# EAGLE board CT_schematic (EAGLE 7.6.0)

Size 100 x 80 mm. Coordinates in mm from the lower left corner, seen from the top.
Outline: 0,0 100,0 100,80 0,80 0,0
Copper layers (1*16): Top 0.035mm / dielectric 1.5mm / Bottom 0.035mm
Design rules "default": minimum track width 10mil, minimum drill 24mil, track to track 8mil, track to pad 8mil, pad to pad 8mil, via to via 8mil, smd to smd 8mil, copper to edge 40mil, drill to drill 8mil, minimum pad ring 10mil, minimum via ring 8mil, stop-mask expansion 4mil, vias tented up to drill 0mil, thermal gap 10mil

## Footprints (pad centres in the part's own frame; a part is rotated, then mirrored left to right if it is on the bottom)
C0603 = smd 0.8 x 0.8: 1 -0.762,0; 2 0.762,0
C0402 = smd 0.5 x 0.5: 1 -0.508,0; 2 0.508,0
C0805 = smd 1.2 x 1.3: 1 -1.016,0; 2 1.016,0
C1206 = smd 1.3 x 1.6: 1 -1.524,0; 2 1.524,0
L0603 = smd 0.8 x 0.8: 1 -0.762,0; 2 0.762,0
R0603 = smd 0.8 x 0.8: 1 -0.762,0; 2 0.762,0
UFQFPN32 = smd 0.6 x 0.3: 1 -2.35,1.75; 2 -2.35,1.25; 3 -2.35,0.75; 4 -2.35,0.25; 5 -2.35,-0.25; 6 -2.35,-0.75; 7 -2.35,-1.25; 8 -2.35,-1.75; 17 2.35,-1.75; 18 2.35,-1.25; 19 2.35,-0.75; 20 2.35,-0.25; 21 2.35,0.25; 22 2.35,0.75; 23 2.35,1.25; 24 2.35,1.75 | smd 0.3 x 0.6: 9 -1.75,-2.35; 10 -1.25,-2.35; 11 -0.75,-2.35; 12 -0.25,-2.35; 13 0.25,-2.35; 14 0.75,-2.35; 15 1.25,-2.35; 16 1.75,-2.35; 25 1.75,2.35; 26 1.25,2.35; 27 0.75,2.35; 28 0.25,2.35; 29 -0.25,2.35; 30 -0.75,2.35; 31 -1.25,2.35; 32 -1.75,2.35 | smd 3.45 x 3.45: EPAD 0,0
TST-110-05-T-D-RA = drill 1 pad 1.7 square: 1 0,0 | drill 1 pad 1.7: 2 0,2.54; 3 2.54,0; 4 2.54,2.54; 5 5.08,0; 6 5.08,2.54; 7 7.62,0; 8 7.62,2.54; 9 10.16,0; 10 10.16,2.54; 11 12.7,0; 12 12.7,2.54; 13 15.24,0; 14 15.24,2.54; 15 17.78,0; 16 17.78,2.54; 17 20.32,0; 18 20.32,2.54; 19 22.86,0; 20 22.86,2.54
FCI_10118193-0001LF = smd 0.4 x 1.35: 1 -1.3,2.675; 2 -0.65,2.675; 3 0,2.675; 4 0.65,2.675; 5 1.3,2.675 | smd 1.6 x 1.4: 6 -3.2,2.45; 7 3.2,2.45 | smd 1.9 x 1.9: 8 -1.2,0; 9 1.2,0 | hole 0.5: -3.3,0; 3.3,0
SOT143B = smd 1 x 0.7: 1 -0.75,-1 | smd 0.6 x 0.7: 2 0.95,-1; 3 0.95,1; 4 -0.95,1
ABS07-32.768KHZ-7-T = smd 1.1 x 2.4: 1 -2.5,0; 2 0,0
WSON-8 = smd 0.3 x 0.6: 1 -0.75,0; 2 0.05,0; 3 0.85,0; 4 1.65,0; 5 1.65,3.8; 6 0.85,3.8; 7 0.05,3.8; 8 -0.75,3.8 | smd 3 x 2.6: PAD 0.45,1.9
DFN8_2X3MC = smd 0.813 x 0.305: 1 -1.398,0.75; 2 -1.398,0.25; 3 -1.398,-0.25; 4 -1.398,-0.75; 5 1.398,-0.75; 6 1.398,-0.25; 7 1.398,0.25; 8 1.398,0.75 | smd 1.753 x 1.549: 9 0,0
JST-2-SMD = smd 1 x 4.6: 1 -1,-3.7; 2 1,-3.7 | smd 1.6 x 3.4: NC1 -3.4,1.5; NC2 3.4,1.5
SON-6 = smd 0.55 x 0.3: 1 -0.355,0.5 | smd 0.52 x 0.3: 2 -0.37,0; 3 -0.37,-0.5; 4 0.37,-0.5; 5 0.37,0; 6 0.37,0.5
SW_4-1437565-2 = smd 1.4 x 2.1: 1 -2.23,4.55; 2 -2.23,-4.55; 3 2.23,4.55; 4 2.23,-4.55
LGM67K-G1J2-24-Z = smd 0.8 x 1.4: A -2,0; C 0,0
NC7SZ125M5X = smd 1.3 x 0.7: 1 -1.3,0.95; 2 -1.3,0; 3 -1.3,-0.95; 4 1.3,-0.95; 5 1.3,0.95

## Placement (x,y rotation side)
C1  1e-07  [C0603]  -53.34,46.99 0 top  (outside the outline)
C2  1e-07  [C0603]  -57.15,46.99 0 top  (outside the outline)
C3  1e-07  [C0603]  -15.24,52.07 0 top  (outside the outline)
C4  1e-07  [C0603]  -19.05,52.07 0 top  (outside the outline)
C5  4.7e-06  [C0603]  -49.53,46.99 0 top  (outside the outline)
C6  1e-08  [C0603]  -22.86,52.07 0 top  (outside the outline)
C7  1e-06  [C0603]  -26.67,52.07 0 top  (outside the outline)
C8  1e-11  [C0402]  -53.34,52.07 0 top  (outside the outline)
C9  1e-11  [C0402]  -57.15,52.07 0 top  (outside the outline)
C10  1e-07  [C0402]  -15.24,57.15 0 top  (outside the outline)
C11  1e-06  [C0603]  -30.48,52.07 0 top  (outside the outline)
C12  1e-05  [C0805]  -27.94,40.64 0 top  (outside the outline)
C13  1e-07  [C0402]  -19.05,57.15 0 top  (outside the outline)
C14  1e-05  [C1206]  -48.26,33.02 0 top  (outside the outline)
C15  1e-05  [C1206]  -54.61,33.02 0 top  (outside the outline)
C16  1e-08  [C0402]  -22.86,57.15 0 top  (outside the outline)
C17  1e-08  [C0402]  -26.67,57.15 0 top  (outside the outline)
F1  240.0  [L0603]  -34.29,52.07 0 top  (outside the outline)
R1  10000.0  [R0603]  -53.34,40.64 0 top  (outside the outline)
R2  1000.0  [R0603]  -38.1,52.07 0 top  (outside the outline)
R3  910.0  [R0603]  -41.91,52.07 0 top  (outside the outline)
R4  4700.0  [R0603]  -45.72,52.07 0 top  (outside the outline)
R5  10000.0  [R0603]  -15.24,46.99 0 top  (outside the outline)
R6  10000.0  [R0603]  -20.32,46.99 0 top  (outside the outline)
R7  100000.0  [R0603]  -33.02,40.64 0 top  (outside the outline)
R8  36000.0  [R0603]  -25.4,46.99 0 top  (outside the outline)
R9  100000.0  [R0603]  -38.1,40.64 0 top  (outside the outline)
R10  10000.0  [R0603]  -30.48,46.99 0 top  (outside the outline)
R11  10000.0  [R0603]  -35.56,46.99 0 top  (outside the outline)
R12  82000.0  [R0603]  -40.64,46.99 0 top  (outside the outline)
R13  300000.0  [R0603]  -43.18,40.64 0 top  (outside the outline)
R14  120000.0  [R0603]  -48.26,40.64 0 top  (outside the outline)
R15  2000.0  [R0603]  -49.53,52.07 0 top  (outside the outline)
R16  10000.0  [R0603]  -45.72,46.99 0 top  (outside the outline)
U1  STM32L062K8U6  [UFQFPN32]  -24.13,17.78 0 top  (outside the outline)
U2  TST-110-05-T-D-RA  [TST-110-05-T-D-RA]  -46.99,24.13 0 top  (outside the outline)
U3  10118193-0001LF  [FCI_10118193-0001LF]  -50.8,16.51 0 top  (outside the outline)
U4  prtr5v0u2ax  [SOT143B]  -39.37,57.15 0 top  (outside the outline)
U5  ABS07-32.768KHZ-7-T  [ABS07-32.768KHZ-7-T]  -27.94,34.29 0 top  (outside the outline)
U6  LP2951ACSDX/NOPB  [WSON-8]  -43.18,15.24 0 top  (outside the outline)
U7  MCP73831T-2ACI/MC  [DFN8_2X3MC]  -49.53,55.88 0 top  (outside the outline)
U8  S2B-PH-SM4-TB(LF)(SN)  [JST-2-SMD]  -41.91,6.35 0 top  (outside the outline)
U9  TPS3895ADRYR  [SON-6]  -43.18,55.88 0 top  (outside the outline)
U10  4-1437565-2  [SW_4-1437565-2]  -27.94,6.35 0 top  (outside the outline)
U11  Q65110A2395  [LGM67K-G1J2-24-Z]  -36.83,34.29 0 top  (outside the outline)
U12  nc7sz125m5x  [NC7SZ125M5X]  -15.24,40.64 0 top  (outside the outline)
U13  nc7sz125m5x  [NC7SZ125M5X]  -21.59,40.64 0 top  (outside the outline)

## Library data of the parts
C1-C17 F1 R1-R16 U1-U13 = circuit_tree

## Nets
CLK_CRYSTAL_U1_2: C8.1 U1.2 U5.1
CLK_CRYSTAL_U1_3: C9.1 U1.3 U5.2
GND: C1.2 C2.2 C3.2 C4.2 C5.2 C6.2 C7.2 C8.2 C9.2 C10.2 C11.2 C12.2 C13.2 C14.2 C15.2 C16.2 C17.2 R2.2 R5.2 R9.2 R12.2 R14.2 R15.2 U1.EPAD U2.4 U2.6 U2.8 U2.10 U2.12 U2.14 U2.16 U2.18 U2.20 U3.5 U3.6 U3.7 U3.8 U3.9 U4.1 U6.3 U6.4 U6.PAD U7.6 U7.9 U8.2 U9.2 U11.C U12.2 U12.3 U13.1 U13.3
INPUT_USBPOWER_5V: C14.1 R16.2 U3.1 U4.4 U7.1 U7.2
NET_U1_4: R4.1 U1.4 U13.4
NET_U1_5: C6.1 C7.1 F1.1 U1.5
NET_U1_30: R3.1 U1.30 U11.A
NET_U1_31: R5.1 U1.31
NET_U1_32: R1.1 U1.32 U10.3 U10.4
NET_U6_5: R7.1 U6.5
NET_U6_7: R8.2 R9.1 U6.7
NET_U7_5: R16.1 U7.5
NET_U7_8: R15.1 U7.8
NET_U9_1: R11.1 R12.1 U9.1
NET_U9_3: R13.2 R14.1 U9.3
NET_U9_4: R10.1 U9.4 U12.4 U13.2
NET_U10_1: R2.1 U10.1 U10.2
PROC_SYS_SWCLK: U1.24 U2.9
PROC_SYS_SWDIO: U1.23 U2.7
PROC_USB_DM: U1.21 U3.2 U4.3
PROC_USB_DP: U1.22 U3.3 U4.2
RST_OUT_U2_SRESET_B: R6.1 U2.15 U12.1
VCC_S1_3V7: C11.1 C15.1 U6.8 U7.3 U7.4 U8.1
VCC_TIER1_1V8: C1.1 C2.1 C3.1 C4.1 C5.1 C10.1 C12.1 C13.1 C16.1 C17.1 F1.2 R1.2 R3.2 R4.2 R6.2 R7.2 R8.1 R10.2 R11.2 R13.1 U1.1 U1.17 U2.1 U6.1 U9.6 U12.5 U13.5

## Tracks (layer width: path | path; a pad name or v marks a point on that pad's centre or on a via)
CLK_CRYSTAL_U1_2  (2 unrouted)
CLK_CRYSTAL_U1_3  (2 unrouted)
GND  (50 unrouted)
INPUT_USBPOWER_5V  (5 unrouted)
NET_U1_4  (2 unrouted)
NET_U1_5  (3 unrouted)
NET_U1_30  (2 unrouted)
NET_U1_31  (1 unrouted)
NET_U1_32  (3 unrouted)
NET_U6_5  (1 unrouted)
NET_U6_7  (2 unrouted)
NET_U7_5  (1 unrouted)
NET_U7_8  (1 unrouted)
NET_U9_1  (2 unrouted)
NET_U9_3  (2 unrouted)
NET_U9_4  (3 unrouted)
NET_U10_1  (2 unrouted)
PROC_SYS_SWCLK  (1 unrouted)
PROC_SYS_SWDIO  (1 unrouted)
PROC_USB_DM  (2 unrouted)
PROC_USB_DP  (2 unrouted)
RST_OUT_U2_SRESET_B  (2 unrouted)
VCC_S1_3V7  (5 unrouted)
VCC_TIER1_1V8  (26 unrouted)